# Altium PCB 第十二届直立摄像头.PcbDoc (part 2 of 3)
Units mil, origin at the board's own origin, x right, y up, seen from the top; angles counter-clockwise.
Board outline 3925 x 2095 mil, 2 copper layers (Top Layer, Bottom Layer); 127 components, 103 nets, 557 pads, 326 vias.
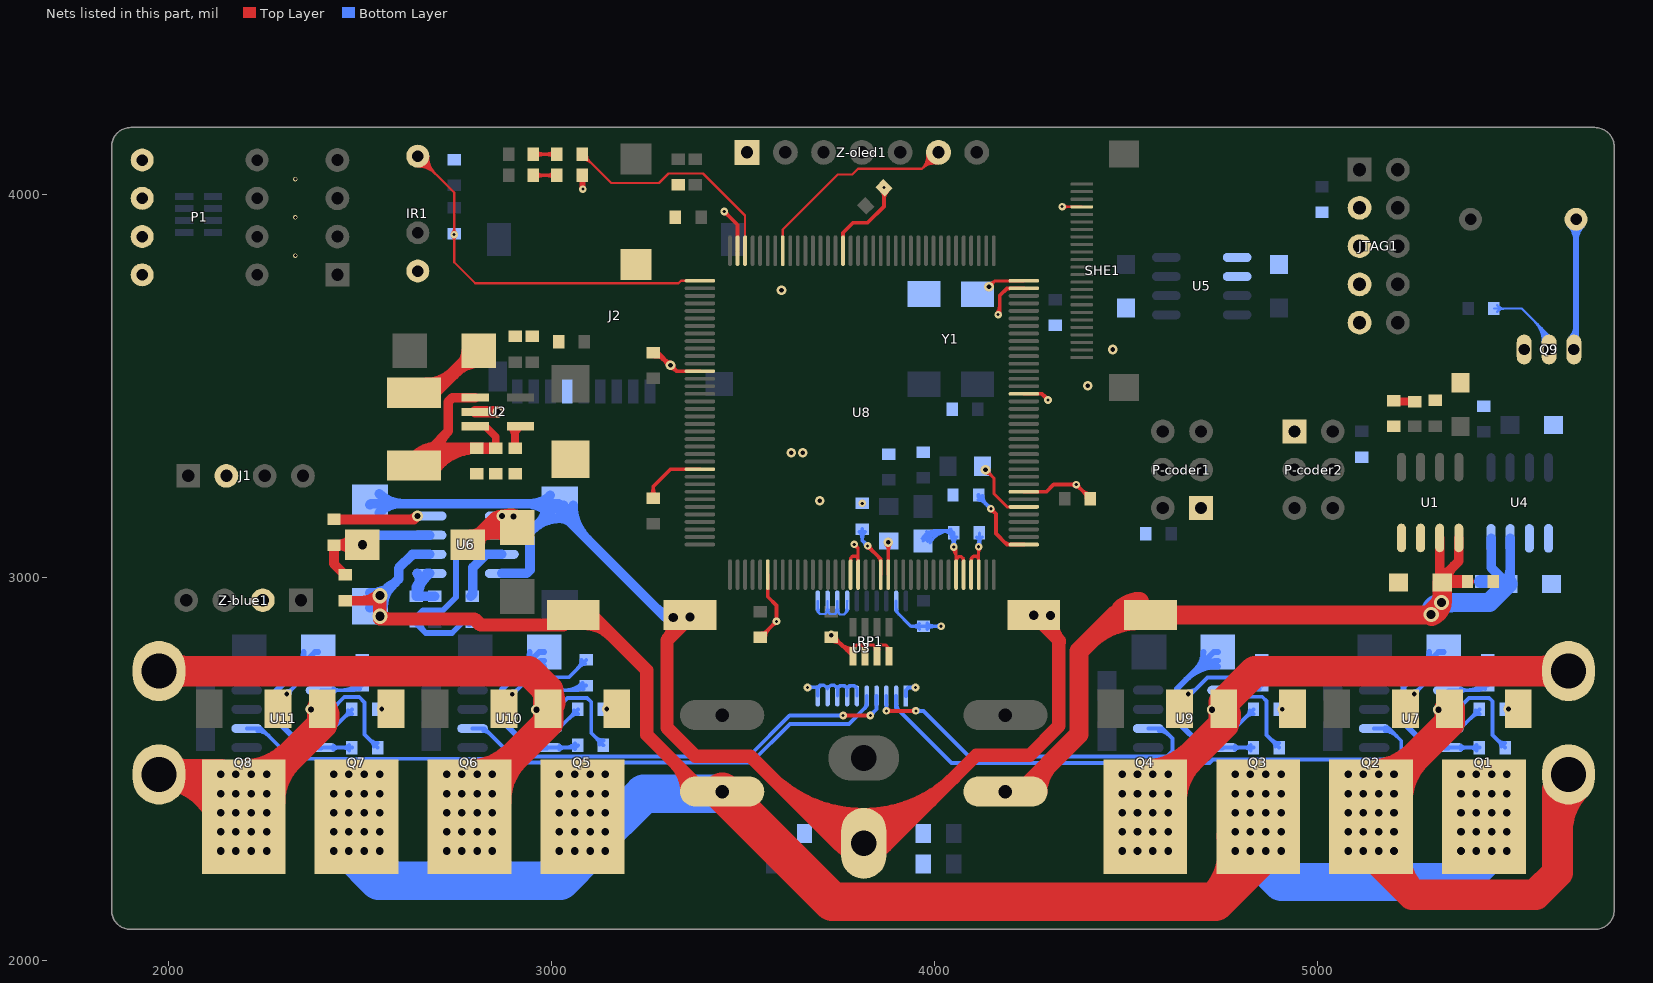
[diagram p2: the nets of this part, all layers, seen from the top]

## Via types
v1: diameter 31.5, hole 19.68, Top Layer to Bottom Layer, 160 vias
v2: diameter 25, hole 12, Top Layer to Bottom Layer, 66 vias
v3: diameter 20, hole 8, Top Layer to Bottom Layer, 61 vias
v4: diameter 40, hole 24, Top Layer to Bottom Layer, 20 vias
v5: diameter 28, hole 16, Top Layer to Bottom Layer, 14 vias
v6: diameter 12, hole 8, Top Layer to Bottom Layer, 3 vias
v7: diameter 39.37, hole 39.37, Top Layer to Bottom Layer, 2 vias

## Nets (pads, with @x,y where several pads share a name; then routed paths per layer and width w, separated by ;. In a path a pad name is that pad's centre, name@x,y a point inside that pad or via, vN(x,y) a via of type N, cw(c..) or ccw(c..) an arc to the next point about the centre after c; other vN are vias at no path point) (continued)
D7V2: C1.1 C22.1 Q1.2 Q3.2 Q5.2 Q7.2 R7.2 U6.6 驱动开关.2 | length 5694.2
  Top Layer w25: R7.2@2460,2939 2534,2939 ; 2501.51,2939 ccw(c2501.51,3001.49) v4@2545.7,2957.3 ; v4@2545,2950 2534,2939 ; v4@2550.1,2944.55 ccw(c2547.75,2925.25) 2534,2939
  Top Layer w35: v4@2551,2891 2798,2891 2813.78,2875.22 3030.22,2875.22 C1.1@3056,2901 3104,2901 3248,2757 3248,2589 3397,2440 驱动开关.2@3445,2440 ; v4(2551,2898) v4(2551,2952) ; v4@2552.77,2899.77 ccw(c2573.93,2920.93) 2573.93,2891 ; C1.1@3085.53,2879.13 cw(c3085.53,2781.73) 3154.4,2850.6 ; 3321.03,2515.97 cw(c3245.07,2440) 驱动开关.2@3352.5,2440
  Top Layer w100: 驱动开关.2@3445,2440 3732.52,2152.48 4733.48,2152.48 ; Q3.2@4786.74,2323.87 cw(c4597.17,2288.81) 4733.49,2152.49 ; v1(4865,2285) 4865,2284 4733.48,2152.48
  Bottom Layer w25: C22.1@2525,2920 2600,2995 2600,3024 2636,3060 U6.6@2680.51,3060 ; C22.1@2525,2959.24 ccw(c2525,3053.96) 2591.98,2986.98 ; C22.1@2533.95,2928.95 ccw(c2510.91,2952) C22.1@2543.5,2952 ; C22.1@2550.01,2959.43 ccw(c2543.53,3007.83) 2584.98,2982.01 ; C22.1@2551,2959.5 ccw(c2551,2992.09) 2574.05,2969.05 ; C22.1@2558.27,2950.14 cw(c2606.19,2937.9) 2580.96,2980.44 ; C22.1@2559.94,2924.3 cw(c2633.93,2924.3) 2581.61,2976.61 ; 2628.67,3052.67 cw(c2648.03,3033.31) U6.6@2648.03,3060.69
  Bottom Layer w100: v1(2470,2285) 2547.75,2207.25 3022.25,2207.25 v1(3100,2285) ; v1@3100,2294 3240.5,2434.5 驱动开关.2@3450.5,2434.5 ; v1(4825,2285) 4906,2204 5374,2204 v1(5455,2285)
  other v1: 2430,2285 2510,2285 2550,2285 3020,2285 3060,2285 3140,2285 4785,2285 4905,2285 5375,2285 5415,2285 5495,2285 2430,2335 2470,2335 2510,2335 2550,2335 3020,2335 3060,2335 3100,2335 3140,2335 4785,2335 4825,2335 4865,2335 4905,2335 5375,2335 5415,2335 5455,2335 5495,2335 2430,2385 2470,2385 2510,2385 2550,2385 3020,2385 3060,2385 3100,2385 3140,2385 4785,2385 4825,2385 4865,2385 4905,2385 5375,2385 5415,2385 5455,2385 5495,2385 2430,2435 2470,2435 2510,2435 2550,2435 3020,2435 3060,2435 3100,2435 3140,2435 4785,2435 4825,2435 4865,2435 4905,2435 5375,2435 5415,2435 5455,2435 5495,2435 2430,2485 2470,2485 2510,2485 2550,2485 3020,2485 3060,2485 3100,2485 3140,2485 4785,2485 4825,2485 4865,2485 4905,2485 5375,2485 5415,2485 5455,2485 5495,2485
DC_MOSI_SOUT: U8.101 Z-oled1.6 | length 752.4
  Top Layer w6: U8.101@3603.31,3853.07 3603.31,3908.31 3747,4052 3785.03,4052 3800.03,4067 3967,4067 ; Z-oled1.6@3980.71,4106.53 cw(c3933.12,4100.89) 3967,4067 ; Z-oled1.6@3986.66,4107.23 cw(c3948.75,4102.74) 3975.75,4075.75 cw(c4002.74,4048.75) Z-oled1.6@4007.23,4086.66 ; Z-oled1.6@3992.62,4107.94 cw(c3964.39,4104.59) 3984.49,4084.49 cw(c4004.59,4064.39) Z-oled1.6@4007.94,4092.62 ; Z-oled1.6@4006.53,4080.71 ccw(c4000.89,4033.12) 3967,4067 ; Z-oled1.6@4010,4110 3967,4067
IR_OUT: IR1.3 R9.1 U8.109 | length 1275.5
  Top Layer w6: IR1.3@2650,4073 cw(c2650,4007.82) 2696.09,4053.91 cw(c2742.18,4100) IR1.3@2677,4100 ; IR1.3@2650,4079 cw(c2650,4028.3) 2685.85,4064.15 cw(c2721.7,4100) IR1.3@2671,4100 ; IR1.3@2650,4085 cw(c2650,4048.79) 2675.61,4074.39 cw(c2701.21,4100) IR1.3@2665,4100 ; IR1.3@2650,4100 2745,4005 2745,3823.2 2800,3768.2 3331.2,3768.2 3337.49,3774.49 U8.109@3386.93,3774.49 ; v3@2740.05,3890.05 cw(c2728.1,3878.1) 2745,3878.1 cw(c2761.9,3878.1) v3@2749.95,3890.05 ; v3@2740.05,3899.95 ccw(c2728.1,3911.9) 2745,3911.9 ccw(c2761.9,3911.9) v3@2749.95,3899.95
  other v3: 2745,3895
LED0: R20.2 U8.106 | length 665.5
  Top Layer w6: R20.2@3080,4090.5 cw(c3080,4055.49) 3104.75,4080.25 ; R20.2@3080,4096.5 cw(c3080,4075.98) R20.2@3094.51,4090.49 ; R20.2@3080,4105 3155,4030 3280,4030 3305,4055 3395,4055 3504.88,3945.12 U8.106@3504.88,3853.07 ; R20.2@3092,4102.5 ccw(c3114.93,4102.5) 3098.72,4086.28
M7V2: C4.1 C5.1 C9.1 C16.1 C17.2 U1.3 U1.4 U4.3 U4.4 主板开关.2 | length 3113.8
  Top Layer w25: 5319.39,3025.47 ccw(c5364.09,3025.47) C4.1@5332.49,2993.86 ; U1.3@5319.39,3102.69 5319.39,2992.61 5369.39,3042.61 U1.4@5369.39,3102.69 ; C4.1@5338.5,2986 cw(c5400.57,2986) 5356.68,3029.89
  Top Layer w30: C4.1@5319.39,2992.61 5323,2989 C4.1@5326,2986 C4.1@5329,2989
  Top Layer w35: C4.1@5323,2989 5329,2989 C5.1@5392,2989
  Top Layer w50: 主板开关.2@4185,2440 4227.27,2440 4377,2589.73 4377,2807 4471,2901 C9.1@4564,2901 5290,2901 v4@5326,2937 ; 主板开关.2@4270,2440 cw(c4373.15,2440) 4300.21,2512.94 ; 4401.59,2831.59 cw(c4534.47,2698.7) C9.1@4534.47,2886.63 ; 4486.94,2916.94 cw(c4534.47,2869.41) C9.1@4534.47,2936.63 ; v4@5298.67,2898.29 ccw(c5284.92,2937) v4@5326,2937 ; v4@5300.54,2899.46 ccw(c5239.06,2960.94) 5326,2960.94 ; C4.1@5326,2986 v4@5326,2937
  Bottom Layer w25: U4.4@5453.61,3101.69 5453.61,3025.39 5490,2989 5503.61,3002.61 U4.3@5503.61,3101.69 ; C16.1@5475.66,3003.34 cw(c5454.32,2982) C16.1@5484.5,2982 ; C16.1@5478.99,3000.01 ccw(c5495.62,3016.65) C16.1@5495.62,2993.12 ; C16.1@5490.51,2989.86 ccw(c5458.91,3021.47) 5503.61,3021.47
  Bottom Layer w35: C17.2@5426,2989 5490,2989 C16.1@5497,2982 ; 5463.94,2989 cw(c5463.94,2950.32) C16.1@5491.29,2977.67
  Bottom Layer w50: v4@5292.03,2903.54 cw(c5326,2899.83) 5326,2934 5449,2934 C16.1@5497,2982 ; v4@5293.46,2906.54 cw(c5359.77,2840.23) 5359.77,2934 ; v4(5297,2903) v4@5326,2932
  other v4: 5324,2934
MGND: C1.2 C2.2 C3.1 C4.2 C5.2 C6.1 C7.1 C8.1 C9.2 C10.1 C11.1 C12.1 C13.1 C14.2 C15.1 C16.2 C17.1 C18.2 C19.2 C20.2 C21.2 C22.2 C23.1 C28.1 C29.1 C32.1 C33.1 C34.2 C35.1 C36.1 C37.1 C38.1 C39.1 C40.1 C42.1 C43.1 C46.1 C47.1 C48.1 C49.2 C50.2 D3.1 IR1.1 J1.2 J2.6 JTAG1.2 JTAG1.3 JTAG1.4 JTAG1.5 P1.1 P1.2 P1.3 P1.4 P-coder1.1 P-coder2.1 POWER1.2 Q9.2 R1.1 R3.2 R4.2 R5.2 R6.2 R14.1 R19.2 RP1.1 RP1.3 RP1.5 RP1.7 RST1.2 SHE1.4 U1.1 U1.2 U2.2 U3.1 U3.6 U3.7 U3.8 U3.9 U3.10 U3.11 U3.12 U3.13 U3.14 U3.19 U4.1 U4.2 U5.1 U5.2 U6.2 U6.4 U8.6 U8.17 U8.18 U8.33 U8.34 U8.44 U8.57 U8.71 U8.93 U8.107 U8.121 U8.134 Y1.2 Z-blue1.2 Z-oled1.1 | length 10534.5
  Top Layer w6: v3(4333,3968) 4333.2,3967.8 SHE1.4@4384.69,3967.8 ; v3@4337.95,3963.05 cw(c4349.41,3951.59) 4349.41,3967.8 ; v3@4337.95,3972.95 ccw(c4350.39,3985.39) 4350.39,3967.8
  Top Layer w8: U8.17@3780.47,3006.93 3780.47,3050.47 3785,3055 ; U8.17@3781.44,3042.17 cw(c3794.56,3045.44) 3785,3055 ; RP1.7@3786.51,2794 3786.51,2814.51 3795,2823 ; v3(3790,3086) 3800.16,3075.84 ; v3@3790.04,3080 cw(c3790.12,3065.8) 3800.16,3075.84 ; RP1.7@3791.26,2810.2 cw(c3804.82,2813.18) 3795,2823 ; v3@3796,3085.96 ccw(c3810.2,3085.88) 3800.16,3075.84 ; U8.18@3799.17,3042.09 ccw(c3784.47,3044.47) 3795,3055 ; U8.18@3800.16,3006.93 3800.16,3049.84 ; RP1.5@3813.32,2810.44 ccw(c3800.87,2813.86) 3810,2823 ; RP1.5@3818.01,2794 RP1.5@3818.01,2814.99 ; RP1.5@3822.69,2810.45 cw(c3835.11,2813.89) 3826,2823 ; RP1.3@3844.76,2810.19 ccw(c3831.16,2813.16) 3841,2823 ; RP1.3@3854.11,2810.7 cw(c3865.48,2814.52) 3857,2823 ; RP1.1@3876.32,2810.45 ccw(c3863.88,2813.88) 3873,2823 ; RP1.1@3881,2794 3881,2815 3873,2823 ; U8.33@4095.43,3006.93 4095.43,3049.43 4101,3055 ; U8.33@4096.43,3042.04 cw(c4112.26,3043.74) 4101,3055 ; v3@4110.76,3075.52 cw(c4100.23,3064.99) 4115.12,3064.99 ; U8.34@4114.13,3042.09 ccw(c4099.54,3044.54) 4110,3055 ; v3(4115,3079.76) 4115.12,3079.88 4115.12,3049.88 ; U8.34@4115.12,3006.93 4115.12,3049.88 ; 4115.12,3065.56 cw(c4129.2,3065.56) v3@4119.24,3075.52 ; v4(4259,2901) C9.2@4302,2901 ; C9.2@4261.96,2901 cw(c4261.96,2858.96) C9.2@4291.69,2888.69 ; C9.2@4266.79,2901 ccw(c4266.79,2936.21) C9.2@4291.69,2911.31 ; C9.2@4270.31,2889.69 cw(c4297.63,2862.37) 4297.63,2901 cw(c4297.63,2939.63) C9.2@4270.31,2912.31 ; C9.2@4272.34,2892.17 cw(c4279.48,2887.44) 4281.7,2895.71 cw(c4284.14,2904.81) C9.2@4274.82,2903.4 ; C9.2@4273.25,2908.27 ccw(c4279.27,2911.34) 4281.02,2904.81 ccw(c4283.27,2896.41) C9.2@4274.72,2898.02 ; C9.2@4281.27,2901 cw(c4281.27,2878.27) C9.2@4297.34,2894.34 ; 3785,3055 3795,3055 ; 3795,2823 3810,2823 ; 3795,3055 3800.16,3049.84 ; 3800.16,3049.84 3800.16,3075.84 ; 3810,2823 RP1.5@3818.01,2814.99 ; RP1.5@3818.01,2815.01 3826,2823 ; 3826,2823 3841,2823 ; 3841,2823 3849.5,2814.5 3849.5,2815.5 3857,2823 ; 3857,2823 3873,2823 ; 4101,3055 4110,3055 ; 4110,3055 4115.12,3049.88
  Top Layer w10: C43.1@3257.93,3214.07 ccw(c3240.86,3231.14) 3265,3231.14 ccw(c3289.14,3231.14) C43.1@3272.07,3214.07 ; C43.1@3265,3207 3265,3237 3310.36,3282.36 U8.134@3386.93,3282.36 ; C40.1@3265,3587 3277,3587 v2(3310,3554) 3325.73,3538.27 U8.121@3386.93,3538.27 ; C40.1@3267.5,3577 cw(c3267.5,3529.92) 3300.79,3563.21 ; C40.1@3267.5,3587 cw(c3267.5,3564.07) 3283.72,3580.28 ; 3288.96,3570.04 cw(c3274.15,3544.39) v2@3302.76,3552.06 ; 3299.1,3564.18 cw(c3295.28,3557.56) v2@3302.71,3555.77 ; v2@3302.5,3554 ccw(c3284.39,3554) 3297.2,3566.8 ccw(c3310,3579.61) v2@3310,3561.5 ; v2@3310,3546.5 cw(c3310,3528.39) 3322.8,3541.2 cw(c3335.61,3554) v2@3317.5,3554 ; v3@3450.5,3950.5 cw(c3450.5,3938.43) 3459.04,3946.96 cw(c3467.57,3955.5) v3@3455.5,3955.5 ; v3(3450.5,3955.5) 3485.2,3920.8 U8.107@3485.2,3853.07 ; C39.1@3545,2843 v3(3587,2885) 3587,2926 3563.94,2949.06 U8.6@3563.94,3006.93 ; C39.1@3547.5,2853 ccw(c3547.5,2871.11) 3560.3,2858.3 ; C39.1@3557.5,2843 cw(c3587.68,2843) 3566.34,2864.34 ; v3@3582,2885 cw(c3569.93,2885) 3578.46,2876.46 cw(c3587,2867.93) v3@3587,2880 ; v3@3583.46,2888.54 ccw(c3574.93,2897.07) 3587,2897.07 ccw(c3599.07,2897.07) v3@3590.54,2888.54 ; C42.1@3730,2841.5 cw(c3730,2819.74) C42.1@3745.38,2835.13 ; C42.1@3730,2843 3737.51,2843 RP1.7@3786.51,2794 ; C42.1@3730.35,2851.48 cw(c3728.15,2835.95) C42.1@3743.3,2840.01 ; C42.1@3730.79,2851.37 cw(c3724.36,2832.06) C42.1@3744.02,2837.33 ; C42.1@3732.5,2833 cw(c3732.5,2796.76) 3758.13,2822.38 ; C42.1@3737.5,2849 ccw(c3751.96,2849) C42.1@3741.73,2838.78 ; C42.1@3742.5,2843 ccw(c3754.54,2843) C42.1@3746.03,2834.48 ; 3754.05,2826.46 ccw(c3786.51,2858.92) RP1.7@3786.51,2813.02 ; U8.93@3760.79,3853.07 3760.79,3900.16 3786.63,3926 3825,3926 3867.63,3968.63 v3(3867.63,4017.63) ; 3771.12,2809.39 ccw(c3786.51,2824.78) RP1.7@3786.51,2803.02 ; C36.1@3862.32,4008.79 cw(c3849.52,3995.99) 3867.63,3995.99 ; C36.1@3864.09,4014.09 cw(c3855.56,4005.56) 3867.63,4005.56 cw(c3879.7,4005.56) C36.1@3871.16,4014.09 ; 3867.63,3987.45 cw(c3897.81,3987.45) C36.1@3876.47,4008.79 ; v3(3950,2712) v3@3951,2711 ; v3@4162.46,3689.54 ccw(c4144.27,3707.73) 4170,3707.73 ; v3(4166,3686) 4170,3690 4170,3736 4188.8,3754.8 U8.71@4233.07,3754.8 ; 4182.25,3748.25 cw(c4198.07,3732.43) U8.71@4198.07,3754.8 ; U8.44@4233.07,3223.31 4292.31,3223.31 4311,3242 v3(4370,3242) C38.1@4407,3205 ; U8.57@4233.07,3479.21 4280.79,3479.21 4296,3464 v3(4296,3463) ; 4286.76,3473.24 cw(c4276.51,3463) v3@4291,3463 ; 4289.17,3470.83 ccw(c4296,3477.66) v3@4296,3468 ; v3@4366.46,3238.46 ccw(c4357.93,3229.93) 4357.93,3242 ccw(c4357.93,3254.07) v3@4366.46,3245.54 ; v3@4370,3237 cw(c4370,3224.93) 4378.54,3233.46 cw(c4387.07,3242) v3@4375,3242 ; 4385.66,3226.34 ccw(c4407,3247.68) C38.1@4407,3217.5 ; 4391.7,3220.3 cw(c4378.89,3207.5) C38.1@4397,3207.5
  Top Layer w15: R19.2@3074.7,4042.2 cw(c3061.89,4029.39) 3080,4029.39 cw(c3098.11,4029.39) R19.2@3085.3,4042.2 ; R19.2@3080,4050 3080,4015 v3(3081,4014)
  Top Layer w30: U2.2@2799.94,3432 v5(2859,3432)
  Top Layer w35: C1.2@3311.47,2892.15 cw(c3265.29,2871.71) 3301,2836 ; C1.2@3314.63,2894.2 cw(c3260.92,2876.08) 3301,2836 ; v4(3361,2896) 3301,2836 ; 3569.14,2481.86 ccw(c3815,2727.71) 3815,2380.02 ccw(c3815,2715.64) 4052.32,2478.32 ; 3628.89,2422.11 ccw(c3815,2608.22) 3815,2345.02 ccw(c3815,2596.15) 3992.57,2418.57 ; 3688.64,2362.36 ccw(c3815,2488.72) 3815,2310.02 ccw(c3815,2476.65) 3932.82,2358.82 ; 3748.39,2302.61 ccw(c3815,2369.22) 3815,2275.02 ccw(c3815,2357.15) POWER1.2@3873.08,2299.08 ; POWER1.2@3778.27,2285.57 ccw(c3746,2268.5) 3746,2305 ; POWER1.2@3778.27,2324.43 cw(c3746,2341.5) 3746,2305 ; POWER1.2@3852.96,2288.09 cw(c3879,2276.5) 3879,2305 ; POWER1.2@3852.96,2321.91 ccw(c3879,2333.5) 3879,2305 ; v4(4259,2901) 4326,2834 ; C9.2@4301.23,2898.24 cw(c4280.86,2877.95) C9.2@4309.61,2877.9 ; C9.2@4305.46,2899.56 ccw(c4378.41,2886.42) 4326,2834 ; C9.2@4309.64,2895.3 ccw(c4370.78,2878.78) 4326,2834 ; 3301,2836 3301,2606.98 3374.98,2533 3518,2533 3746,2305 ; 3746,2305 POWER1.2@3815,2305 3879,2305 ; 3879,2305 4109,2535 4248.03,2535 4324.5,2611.47 4324.5,2828.75 4326,2830.25 4326,2834
  Bottom Layer w6: U3.11@3692.63,2914.32 cw(c3687.67,2909.36) 3694.68,2909.36 cw(c3701.7,2909.36) U3.11@3696.74,2914.32 ; U3.11@3694.68,2938.03 3694.68,2909.32 3700,2904 ; U3.11@3697.42,2915.41 ccw(c3707.74,2911.74) 3700,2904 ; U3.12@3717.44,2915.75 cw(c3704.98,2913.02) 3714,2904 ; U3.12@3718.44,2914.12 cw(c3715.32,2910.28) 3720.28,2910.28 ; U3.12@3720.28,2938.03 3720.28,2910.28 ; U3.12@3722.11,2914.12 ccw(c3725.23,2910.28) 3720.28,2910.28 ; U3.12@3723.11,2915.75 ccw(c3735.57,2913.02) 3726.55,2904 ; U3.13@3743.04,2915.7 cw(c3730.92,2912.81) 3739.73,2904 ; U3.13@3743.99,2914.16 cw(c3740.61,2910.13) 3745.87,2910.13 ; U3.13@3745.87,2938.03 3745.87,2910.13 ; U3.13@3747.74,2914.16 ccw(c3751.12,2910.13) 3745.87,2910.13 ; U3.13@3748.74,2915.95 ccw(c3763.69,2913.69) 3753,2903 ; U3.14@3768.57,2916.05 cw(c3752.73,2914.27) 3764,2903 ; U3.14@3769.4,2914.32 cw(c3765.54,2910.47) 3771,2910.47 ; U3.14@3771.46,2938.03 3771,2937.58 3771,2910 ; U3.14@3773.1,2913.98 ccw(c3775.86,2909.98) 3771,2909.98 ; 3700,2904 3714,2904 ; 3714,2904 3720.28,2910.28 ; 3720.28,2910.28 3726.55,2904 ; 3726.55,2904 3739.73,2904 ; 3739.73,2904 3745.87,2910.13 ; 3745.87,2910.13 3753,2903 ; 3753,2903 3764,2903 ; 3764,2903 3771,2910
  Bottom Layer w8: v3@3668,2713 v3@3668.32,2712.68 ; U3.10@3694.68,2690 3694.68,2712.68 3700,2718 3711,2718 ; U3.10@3696.22,2710.52 cw(c3711,2699.65) 3711,2718 ; U3.10@3696.59,2711.65 cw(c3703.68,2711.65) 3698.67,2716.67 ; 3712.02,2716.98 ccw(c3720.28,2725.23) 3720.28,2713.56 ccw(c3720.28,2723.9) 3727.59,2716.59 ; 3740.02,2715.98 ccw(c3745.87,2721.83) 3745.87,2713.56 ccw(c3745.87,2724.89) 3753.88,2716.88 ; U3.8@3745.87,2690 U3.8@3745.87,2708.87 ; U3.8@3747.21,2710.31 cw(c3763.37,2694.15) 3763.37,2717 ; U3.8@3747.76,2711.44 cw(c3754,2710.72) 3754,2717 ; U3.7@3770.11,2710.31 ccw(c3754,2694.27) 3754,2717 ; U3.7@3771.46,2690 U3.7@3771.46,2711.54 ; U3.7@3772.8,2710.31 cw(c3788.96,2694.15) 3788.96,2717 ; 3779.54,2717 cw(c3779.54,2694.15) U3.6@3795.7,2710.31 ; v3(3790,3086) v3@3791,3087 ; U3.6@3797.05,2690 3797.05,2710.95 3791,2717 3776.91,2717 U3.7@3771.46,2711.54 ; U3.19@3899.41,2938.03 3899.41,2910.59 3938,2872 C10.1@3971,2872 ; U3.19@3901.31,2916.38 ccw(c3919.89,2916.38) 3906.75,2903.25 ; C10.1@3960.72,2864.22 ccw(c3941.94,2845.44) 3941.94,2872 ccw(c3941.94,2898.56) C10.1@3960.72,2879.78 ; C33.1@4109.22,3105.72 cw(c4090.44,3086.94) 4117,3086.94 cw(c4143.56,3086.94) C33.1@4124.78,3105.72 ; v3@4110.76,3084.01 ccw(c4095.69,3099.08) C33.1@4117,3099.08 ; v3@4111.69,3084.77 ccw(c4107.09,3091.72) 4115.14,3093.88 ; v3@4112,3084.96 ccw(c4104.63,3097.72) 4118.87,3093.91 ; v3(4115,3079.76) 4117,3081.76 C33.1@4117,3116 ; 4118.77,3093.56 ccw(c4132.52,3089.88) v3@4120.2,3082.76 ; 3711,2718 3720.28,2708.72 3720.28,2709.28 3729,2718 3738,2718 3745.87,2710.13 U3.8@3745.87,2708.87 ; U3.8@3745.87,2708.87 3754,2717 ; 3754,2717 3766,2717 U3.7@3771.46,2711.54
  Bottom Layer w10: v3@3668.32,2712.68 U3.10@3694.68,2712.68 ; v3@3671.54,2708.46 cw(c3681.72,2698.28) 3681.72,2712.68 ; v3@3671.54,2715.54 ccw(c3678.42,2722.42) 3678.42,2712.68 ; U3.1@3925,2690 3925,2705 3932,2712 v3(3950,2712) ; v3@3946.46,2708.46 ccw(c3937.93,2699.93) 3937.93,2712 ccw(c3937.93,2724.07) v3@3946.46,2715.54 ; C10.1@3971,2872 v3(4017,2872) ; C10.1@3980.57,2864.93 cw(c3997.64,2847.86) 3997.64,2872 cw(c3997.64,2896.14) C10.1@3980.57,2879.07 ; v3@4013.46,2868.46 ccw(c4004.93,2859.93) 4004.93,2872 ccw(c4004.93,2884.07) v3@4013.46,2875.54
  Bottom Layer w15: R14.1@2655.81,2885.66 cw(c2685.59,2892.41) 2664,2914 ; R14.1@2656,2884 ccw(c2691.23,2884) 2666.32,2859.09 ; C21.2@2784.2,2877.7 ccw(c2771.39,2864.89) 2771.39,2883 ccw(c2771.39,2901.11) C21.2@2784.2,2888.3 ; C21.2@2792,2883 2768,2883 2739.5,2854.5 2670.91,2854.5 2646,2879.41 R14.1@2646,2884 2646,2896 2664,2914 ; U6.2@2869.49,3110 2795,3110 2750,3065 2750,2948 2716,2914 2664,2914
  Bottom Layer w25: C22.2@2525,3190 2527.5,3192.5 C20.2@3017.5,3192.5 ; C22.2@2549.71,3169 cw(c2606.45,3112.26) 2606.45,3192.5 ; C22.2@2549.71,3218.41 ccw(c2612.26,3280.97) 2612.26,3192.5 ; U6.4@2869.49,3010 2934,3010 2943,3019 2943,3102 2935,3110 ; U6.2@2869.49,3110 2935,3110 ; 2928.91,3192.5 cw(c2928.91,3097.2) C20.2@2996.29,3164.59 ; 2944.38,3192.5 ccw(c2944.38,3265.91) C20.2@2996.29,3214 ; 2948.9,3123.9 cw(c3021,3051.8) 3021,3153.76 cw(c3021,3112.15) C20.2@3050.42,3141.58 ; 2966.51,3141.51 ccw(c2919.32,3188.7) C20.2@2986.06,3188.7 ; C20.2@3030.94,3188.7 ccw(c3097.68,3188.7) C20.2@3050.49,3141.51 ; C20.2@3055.94,3188.7 ccw(c3183.04,3188.7) 3093.17,3098.83 ; 3270.05,2921.95 ccw(c3317,2968.89) v4@3317,2902.5 ; 3296.48,2896 cw(c3296.48,2874.48) v4@3311.7,2889.7 ; v4@3322.3,2889.7 cw(c3337.52,2874.48) 3337.52,2896 ; v4(3361,2896) 3296,2896 3021,3171 C20.2@3021,3189 C20.2@3017.5,3192.5 ; 2935,3110 C20.2@3017.5,3192.5
  other v2: 3730,2849 3700,3200 3625,3325 3655,3325 4400,3500 4465,3595 3600,3750
  other v3: 3668,2712 3811,3193
  other v4: 3317,2895 4303,2900
  other v6: 2330,3840 2330,3940 2330,4040
MOTOR_IN1: U3.2 U7.2 | length 1599
  Bottom Layer w10: U3.2@3899.41,2690 3899.41,2659.59 4044,2515 4718,2515 4727,2524 5195,2524 5219,2548 5219,2573 5187,2605 U7.2@5148,2605 ; U3.2@3900.31,2668.35 ccw(c3923.64,2668.35) 3907.15,2651.85 ; U7.2@5176.19,2598.19 cw(c5176.19,2555.65) 5206.27,2585.73 ; U7.2@5176.19,2608.19 cw(c5176.19,2589.79) 5189.2,2602.8
MOTOR_IN2: U3.3 U9.2 | length 1053.6
  Top Layer w10: v3@3873,2651 v3(3951,2651) ; v3@3877.54,2647.46 cw(c3886.07,2638.93) 3886.07,2651 cw(c3886.07,2663.07) v3@3877.54,2654.54 ; v3@3947.46,2647.46 ccw(c3938.93,2638.93) 3938.93,2651 ccw(c3938.93,2663.07) v3@3947.46,2654.54
  Bottom Layer w10: v3@3870.45,2654.52 ccw(c3861.87,2663.01) 3873.94,2663.07 ccw(c3886.01,2663.13) v3@3877.52,2654.55 ; U3.3@3873.82,2690 v3(3874,2651) ; v3(3951,2651) 3971,2651 4089.81,2532.19 4606.19,2532.19 4621,2547 4621,2579 4595,2605 U9.2@4558,2605 ; v3@3954.54,2647.46 cw(c3963.07,2638.93) 3963.07,2651 cw(c3963.07,2663.07) v3@3954.54,2654.54 ; U9.2@4586.19,2598.19 cw(c4586.19,2560.47) 4612.86,2587.14
MOTOR_IN3: U3.4 U10.2 | length 1265.4
  Top Layer w10: v3(3761,2639) v3(3832,2639) ; v3@3764.54,2635.46 cw(c3773.07,2626.93) 3773.07,2639 cw(c3773.07,2651.07) v3@3764.54,2642.54 ; v3@3828.46,2635.46 ccw(c3819.93,2626.93) 3819.93,2639 ccw(c3819.93,2651.07) v3@3828.46,2642.54
  Bottom Layer w10: U10.2@2793,2605 2824,2605 2897,2532 3514.37,2532 3621.37,2639 v3(3761,2639) ; U10.2@2821.19,2598.19 cw(c2821.19,2574.96) 2837.61,2591.39 ; v3@3757.46,2635.46 ccw(c3748.93,2626.93) 3748.93,2639 ccw(c3748.93,2651.07) v3@3757.46,2642.54 ; v3(3832,2639) 3848.23,2655.23 U3.4@3848.23,2690 ; v3@3832,2644 ccw(c3832,2656.07) 3840.54,2647.54 ccw(c3849.07,2639) v3@3837,2639
MOTOR_IN4: U3.5 U11.2 | length 1786.2
  Bottom Layer w10: U11.2@2203,2605 2241,2605 2320,2526 2852,2526 2862,2516 3521,2516 3622,2617 3776,2617 3822.64,2663.64 U3.5@3822.64,2690 ; U11.2@2231.19,2598.19 cw(c2231.19,2558.06) 2259.56,2586.44 ; 3817.76,2658.76 ccw(c3808.18,2668.35) U3.5@3821.73,2668.35
NetB1_1: B1.1 C24.2 Q1.3 Q2.2 U7.6 | length 2118.2
  Top Layer w80: v1(5080,2335) v1(5080,2285) v1(5120,2285) 5134,2285 5248,2171 ; Q2.2@5140,2484.61 ccw(c5140,2652.65) 5258.83,2533.83 ; v1(5160,2435) 5345.24,2620.24 Q1.3@5345.24,2656.73 ; Q2.2@5207.2,2317.93 ccw(c5357.53,2280.54) 5247.99,2171.01 ; Q2.2@5209.25,2415.35 cw(c5375.59,2415.35) 5257.97,2532.97 ; 5627,2335.38 cw(c5795.78,2335.38) B1.1@5676.43,2454.72 ; B1.1@5665,2485 5627,2447 5627,2228 5570,2171 5248,2171
  Bottom Layer w10: U7.6@5342,2655 5366,2655 5396,2685 5448,2685 5457,2676 5457,2588 C24.2@5490,2555 ; U7.6@5377,2655 cw(c5403.56,2655) 5384.78,2673.78 ; 5468.66,2576.34 ccw(c5490,2597.68) C24.2@5490,2567.5 ; 5474.7,2570.3 cw(c5461.89,2557.5) C24.2@5480,2557.5
  other v1: 5160,2285 5200,2285 5120,2335 5160,2335 5200,2335 5080,2385 5120,2385 5160,2385 5200,2385 5080,2435 5120,2435 5200,2435 5080,2485 5120,2485 5160,2485 5200,2485
  other v5: 5316,2654
NetB1_2: B1.2 C26.2 Q3.3 Q4.2 U9.6 | length 2035.7
  Top Layer w80: v1(4530,2435) v1(4570,2435) 4574,2435 4755.24,2616.24 Q3.3@4755.24,2656.73 4755.24,2673.24 4837,2755 B1.2@5656,2755 ; Q4.2@4550,2484.61 ccw(c4550,2662.31) 4675.65,2536.65 ; Q4.2@4619.25,2415.35 cw(c4775.93,2415.35) 4665.14,2526.14 ; Q3.3@4745.74,2606.74 ccw(c4710.75,2641.73) Q3.3@4760.24,2641.73 ; B1.2@5635.57,2734.57 ccw(c5586.23,2685.24) 5586.23,2755 ccw(c5586.23,2824.76) B1.2@5635.57,2775.43
  Bottom Layer w10: U9.6@4752,2655 4780,2655 4813,2688 4856,2688 4867,2677 4867,2588 C26.2@4900,2555 ; U9.6@4780.19,2661.81 ccw(c4780.19,2677.8) 4791.49,2666.49 ; U9.6@4787,2655 cw(c4803.9,2655) 4791.95,2666.95 ; 4878.66,2576.34 ccw(c4900,2597.68) C26.2@4900,2567.5 ; 4884.7,2570.3 cw(c4871.89,2557.5) C26.2@4890,2557.5
  other v1: 4490,2285 4530,2285 4570,2285 4610,2285 4490,2335 4530,2335 4570,2335 4610,2335 4490,2385 4530,2385 4570,2385 4610,2385 4490,2435 4610,2435 4490,2485 4530,2485 4570,2485 4610,2485
  other v5: 4725,2654
NetB2_1: B2.1 C30.2 Q5.3 Q6.2 U10.6 | length 2135.9
  Top Layer w80: B2.1@1965,2755 2940,2755 2990.24,2704.76 Q5.3@2990.24,2656.73 2990.24,2620.24 v1(2805,2435) ; B2.1@1994.43,2734.57 cw(c2043.77,2685.24) 2043.77,2755 cw(c2043.77,2824.76) B2.1@1994.43,2775.43 ; Q6.2@2785,2484.61 ccw(c2785,2652.65) 2903.83,2533.83 ; Q6.2@2854.25,2415.35 cw(c3020.59,2415.35) 2902.97,2532.97 ; 2975.42,2719.59 cw(c2927.56,2671.73) Q5.3@2995.24,2671.73
  Bottom Layer w10: U10.6@2987,2655 3011,2655 3041,2685 3092,2685 3103,2674 3103,2593 C30.2@3135,2561 ; U10.6@3022,2655 cw(c3048.56,2655) 3029.78,2673.78 ; 3113.66,2582.34 ccw(c3135,2603.68) C30.2@3135,2573.5 ; 3119.7,2576.3 cw(c3106.89,2563.5) C30.2@3125,2563.5
  other v1: 2725,2285 2765,2285 2805,2285 2845,2285 2725,2335 2765,2335 2805,2335 2845,2335 2725,2385 2765,2385 2805,2385 2845,2385 2725,2435 2765,2435 2845,2435 2725,2485 2765,2485 2805,2485 2845,2485
  other v5: 2960,2654
NetB2_2: B2.2 C44.2 Q7.3 Q8.2 U11.6 | length 1528.1
  Top Layer w80: B2.2@1994.43,2464.57 cw(c2043.77,2415.24) 2043.77,2485 cw(c2043.77,2554.76) B2.2@1994.43,2505.43 ; Q8.2@2101.29,2485 cw(c2101.29,2370.26) Q8.2@2204.68,2420.02 ; Q8.2@2132.6,2385.32 ccw(c1974.01,2309) B2.2@1974,2485 v1(2135,2485) ; Q8.2@2195,2484.61 ccw(c2195,2662.31) 2320.65,2536.65 ; v1(2215,2435) 2219,2435 2400.24,2616.24 Q7.3@2400.24,2656.73 ; Q8.2@2264.25,2415.35 cw(c2420.93,2415.35) 2310.14,2526.14 ; Q7.3@2390.74,2606.74 ccw(c2355.75,2641.73) Q7.3@2405.24,2641.73
  Bottom Layer w10: U11.6@2397,2655 2426,2655 2458,2687 2497,2687 2511,2673 2511,2589 C44.2@2545,2555 ; U11.6@2425.19,2661.81 ccw(c2425.19,2680.21) 2438.2,2667.2 ; U11.6@2432,2655 cw(c2446.49,2655) 2436.24,2665.24 ; 2523.66,2576.34 ccw(c2545,2597.68) C44.2@2545,2567.5 ; 2529.7,2570.3 cw(c2516.89,2557.5) C44.2@2535,2557.5
  other v1: 2135,2285 2175,2285 2215,2285 2255,2285 2135,2335 2175,2335 2215,2335 2255,2335 2135,2385 2175,2385 2215,2385 2255,2385 2135,2435 2175,2435 2255,2435 2175,2485 2215,2485 2255,2485
  other v5: 2371,2655
NetBZ1_2: BZ1.2 Q9.3 | length 465.4
  Bottom Layer w15: BZ1.2@5659.68,3919.09 cw(c5621.27,3880.68) 5675.59,3880.68 cw(c5729.91,3880.68) BZ1.2@5691.5,3919.09 ; Q9.3@5661.51,3622.99 ccw(c5627.53,3656.97) 5675.59,3656.97 ; Q9.3@5670,3595 5675.59,3600.59 BZ1.2@5675.59,3935
NetC11_2: C11.2 C12.2 F1.1 U2.1 U2.3 | length 976.1
  Top Layer w20: U2.3@2799.94,3394.6 2826.4,3394.6 2854,3367 C12.2@2854,3337
  Top Layer w25: F1.1@2673.36,3292.18 cw(c2737.43,3298.39) 2691.91,3343.91 ; 2685,3337 2729.37,3381.37 ; F1.1@2698.24,3294.59 cw(c2805.71,3305.01) 2729.36,3381.36 ; U2.1@2799.94,3469.4 2740.4,3469.4 2729.37,3458.37 2729.37,3381.37
  Top Layer w30: F1.1@2640,3292 2685,3337 C11.2@2804,3337 ; F1.1@2642.21,3312.3 cw(c2689.39,3279.59) 2689.39,3337 ; F1.1@2666.87,3295.21 cw(c2746.69,3239.87) 2746.69,3337 ; F1.1@2691.52,3278.12 cw(c2803.99,3200.15) C11.2@2804,3337 ; C12.2@2854,3337 C11.2@2804,3337
NetC13_2: C13.2 U2.4 | length 127.8
  Top Layer w20: U2.4@2892.86,3394.01 cw(c2865.98,3367.13) 2904,3367.13 ; U2.4@2893.11,3393.84 cw(c2885.57,3377.02) 2904,3377.02 ; C13.2@2904,3337 2904,3380.54 U2.4@2918.06,3394.6 U2.4@2931.4,3394.6
NetC21_1: C21.1 U6.3 | length 183.8
  Bottom Layer w25: C21.1@2788,2950 2794,2956 2794,3026 2828,3060 U6.3@2869.49,3060 ; 2822.81,3054.81 cw(c2837.01,3040.61) U6.3@2837.01,3060.69
NetC24_1: C24.1 D7.2 U7.8 | length 738.4
  Bottom Layer w10: U7.8@5342,2555 C24.1@5423,2555 ; U7.8@5375.01,2550.18 cw(c5386.63,2538.56) 5386.63,2555 cw(c5386.63,2571.44) U7.8@5375.01,2559.82 ; C24.1@5415.93,2547.93 ccw(c5398.86,2530.86) 5398.86,2555 ccw(c5398.86,2579.14) C24.1@5415.93,2562.07
  Bottom Layer w15: 5241.61,2730.61 cw(c5330,2642.23) D7.2@5330,2767.22 ; 5267.22,2756.22 cw(c5330,2693.44) D7.2@5330,2782.22 ; 5275.41,2764.41 ccw(c5234.82,2805) D7.2@5292.22,2805 ; D7.2@5330,2805 5316,2805 5225,2714 5225,2620 5290,2555 U7.8@5342,2555
NetC26_1: C26.1 D8.2 U9.8 | length 731.4
  Bottom Layer w10: U9.8@4752,2555 C26.1@4833,2555 ; U9.8@4785.01,2550.18 cw(c4796.63,2538.56) 4796.63,2555 cw(c4796.63,2571.44) U9.8@4785.01,2559.82 ; C26.1@4825.93,2547.93 ccw(c4808.86,2530.86) 4808.86,2555 ccw(c4808.86,2579.14) C26.1@4825.93,2562.07
  Bottom Layer w15: 4656.73,2732.73 cw(c4740,2649.47) D8.2@4740,2767.22 ; 4682.34,2758.34 cw(c4740,2700.68) D8.2@4740,2782.22 ; 4683.29,2759.29 ccw(c4637.58,2805) D8.2@4702.22,2805 ; D8.2@4740,2805 4729,2805 4633,2709 4633,2624 4702,2555 U9.8@4752,2555
NetC28_2: C28.2 U8.21 | length 226
  Top Layer w10: v3@3825,3077 cw(c3825,3064.93) 3833.54,3073.46 cw(c3842.07,3082) v3@3830,3082 ; v3(3825,3082) 3859.21,3047.79 U8.21@3859.21,3006.93 ; 3855.07,3051.93 cw(c3845.07,3041.93) U8.21@3859.21,3041.93
  Bottom Layer w10: C28.2@3803.93,3118.93 cw(c3786.86,3101.86) 3811,3101.86 cw(c3835.14,3101.86) C28.2@3818.07,3118.93 ; C28.2@3811,3126 3811,3096 v3(3825,3082) ; v3@3820,3082 ccw(c3807.93,3082) 3816.46,3090.54 ccw(c3825,3099.07) v3@3825,3087
NetC30_1: C30.1 D9.2 U10.8 | length 738.3
  Bottom Layer w10: U10.8@2987,2555 3062,2555 C30.1@3068,2561 ; U10.8@3020.01,2550.18 cw(c3031.63,2538.56) 3031.63,2555 cw(c3031.63,2571.44) U10.8@3020.01,2559.82 ; 3035.41,2555 ccw(c3035.41,2591.09) C30.1@3060.93,2565.57 ; 3052.31,2555 cw(c3052.31,2542.81) C30.1@3060.93,2551.43
  Bottom Layer w15: 2893.32,2731.32 cw(c2980,2644.64) D9.2@2980,2767.22 ; 2918.93,2756.93 cw(c2980,2695.85) D9.2@2980,2782.22 ; 2924.71,2762.71 ccw(c2882.41,2805) D9.2@2942.22,2805 ; D9.2@2980,2805 2967,2805 2869,2707 2869,2626 2940,2555 U10.8@2987,2555
NetC33_2: C33.2 L2.1 U8.31 U8.32 | length 748.5
  Top Layer w8: v3@4045.76,3074.76 cw(c4021.03,3050.03) 4056,3050.03 ; v3(4050,3079) 4056,3073 4056,3047 ; v3@4051.41,3080.41 cw(c4040.34,3069.34) 4056,3069.34 ; U8.31@4056.06,3006.93 4056,3006.99 4056,3047 ; U8.31@4057.06,3041.93 cw(c4071.87,3041.93) 4061.4,3052.4 ; U8.32@4074.75,3041.96 ccw(c4058.51,3042.51) 4070,3054 ; U8.32@4075.75,3006.93 4075.75,3048.25 4070,3054 ; 4056,3047 4063,3054 4070,3054
  Bottom Layer w8: L2.1@3967.39,3101.49 cw(c4002.7,3081.37) 4002.7,3122 ; L2.1@3970,3095 3997,3122 ; L2.1@3974.34,3097.52 cw(c4016.46,3073.52) 4016.46,3122 ; L2.1@3979.08,3118.94 ccw(c3985.88,3133.12) 3997,3122 ; L2.1@3981.29,3093.56 cw(c4030.23,3065.68) 4030.23,3122 ; L2.1@3988.25,3089.6 cw(c4044,3057.83) C33.2@4044,3122 ; L2.1@3990.77,3103.11 cw(c4012.63,3106.37) 3997,3122 ; 4014.99,3122 cw(c4014.99,3083.49) C33.2@4042.22,3110.72 ; 4031.89,3122 ccw(c4031.89,3136.61) C33.2@4042.22,3126.28 ; 4034.31,3122 cw(c4034.31,3102.81) C33.2@4047.88,3116.38 ; C33.2@4042.22,3105.72 cw(c4023.44,3086.94) 4050,3086.94 cw(c4076.56,3086.94) C33.2@4057.78,3105.72 ; v3@4045,3082.32 ccw(c4030.15,3092.17) 4047.36,3096.78 ; v3@4045.76,3083.24 ccw(c4035.51,3093.49) 4050,3093.49 ccw(c4064.49,3093.49) v3@4054.24,3083.24 ; v3(4050,3079) C33.2@4050,3116 C33.2@4044,3122 ; 4052.64,3096.78 ccw(c4069.85,3092.17) v3@4055,3082.32 ; 3997,3122 C33.2@4044,3122
NetC44_1: C44.1 D14.2 U11.8 | length 723.3
  Bottom Layer w10: U11.8@2397,2555 C44.1@2478,2555 ; U11.8@2430.01,2550.18 cw(c2441.63,2538.56) 2441.63,2555 cw(c2441.63,2571.44) U11.8@2430.01,2559.82 ; C44.1@2470.93,2547.93 ccw(c2453.86,2530.86) 2453.86,2555 ccw(c2453.86,2579.14) C44.1@2470.93,2562.07
  Bottom Layer w15: 2310.54,2734.31 cw(c2390,2654.85) D14.2@2390,2767.22 ; 2331.71,2755.48 ccw(c2282.2,2805) D14.2@2352.22,2805 ; 2336.15,2759.92 cw(c2390,2706.07) D14.2@2390,2782.22 ; D14.2@2390,2805 2381.23,2805 2280,2703.77 2280,2627 2352,2555 U11.8@2397,2555
NetC46_2: C46.2 U8.37 | length 298.5
  Top Layer w10: v3@4147,3174 cw(c4147,3161.93) 4155.54,3170.46 cw(c4164.07,3179) v3@4152,3179 ; v3(4147,3179) 4160,3166 4160,3114 4188.49,3085.51 U8.37@4233.07,3085.51 ; 4181.71,3092.29 ccw(c4198.07,3108.64) U8.37@4198.07,3085.51
  Bottom Layer w10: C46.2@4115,3202.5 cw(c4115,3181.98) 4129.51,3196.49 ; C46.2@4115,3215 4115,3211 v3(4147,3179) ; C46.2@4125,3212.5 ccw(c4152.76,3212.5) 4133.13,3192.87 ; v3@4142,3179 ccw(c4129.93,3179) 4138.46,3187.54 ccw(c4147,3196.07) v3@4147,3184
NetD1_2: D1.2 R1.2 | length 70.7
  Top Layer w20: R1.2@5199,3461 5201,3459 D1.2@5254,3459 ; R1.2@5205.04,3464.54 ccw(c5218.4,3477.9) 5218.4,3459
NetD2_2: D2.2 F1.2 | length 400.2
  Top Layer w35: F1.2@2640,3482 2692,3482 2802,3592 D2.2@2809,3592 ; F1.2@2671.5,3503.87 ccw(c2671.5,3606.17) 2743.83,3533.83 ; 2749.63,3539.63 cw(c2809,3480.27) D2.2@2809,3564.22 ; D2.2@2766.53,3556.53 ccw(c2731.07,3592) D2.2@2781.22,3592
NetD5_1: D5.1 L1.2 U6.1 | length 767.7
  Top Layer w30: L1.2@2786.7,3109.37 ccw(c2786.7,3153.95) L1.2@2818.22,3122.43 ; L1.2@2809.89,3114.1 cw(c2870.62,3053.37) D5.1@2909.87,3129.75 ; L1.2@2811.07,3085 cw(c2884.16,3085) 2832.48,3136.68 ; 2838.98,3143.19 cw(c2890.37,3091.8) D5.1@2923.59,3156.44 ; 2847.82,3152.02 cw(c2869.49,3130.36) D5.1@2869.49,3161 ; D5.1@2868.51,3160.19 ccw(c2899.54,3154.31) D5.1@2873.44,3136.52 ; D5.1@2869.61,3160.99 ccw(c2866.79,3137.41) 2850,3154.21 ; D5.1@2879.86,3127.09 ccw(c2850,3124.2) 2850,3154.2 ; D5.1@2896.16,3103.07 ccw(c2850.87,3014.93) L1.2@2780.8,3085 2850,3154.2 ; D5.1@2899,3159.06 ccw(c2936.72,3156.72) D5.1@2910,3130 2885.8,3154.2 2850,3154.2 ; D5.1@2869.49,3161 cw(c2869.49,3138.04) 2885.73,3154.27 ccw(c2869.49,3138.04) D5.1@2869.49,3161
  other v5: 2900,3159 2869.49,3160
NetD10_2: D10.2 R19.1 | length 136.8
  Top Layer w10: D10.2@2952,4050 R19.1@3013,4050 ; D10.2@2959.07,4042.93 cw(c2976.14,4025.86) 2976.14,4050 cw(c2976.14,4074.14) D10.2@2959.07,4057.07 ; R19.1@3005.93,4042.93 ccw(c2988.86,4025.86) 2988.86,4050 ccw(c2988.86,4074.14) R19.1@3005.93,4057.07
NetD11_2: D11.2 U8.22 | length 113.4
  Top Layer w10: v2@3873.59,3086.59 cw(c3860.79,3073.79) 3878.9,3073.79 cw(c3897,3073.79) v2@3884.2,3086.59 ; U8.22@3878.9,3006.93 v2(3878.9,3091.9)
NetD12_2: D12.2 R20.1 | length 136.8
  Top Layer w10: D12.2@2952,4105 R20.1@3013,4105 ; D12.2@2959.07,4097.93 cw(c2976.14,4080.86) 2976.14,4105 cw(c2976.14,4129.14) D12.2@2959.07,4112.07 ; R20.1@3005.93,4097.93 ccw(c2988.86,4080.86) 2988.86,4105 ccw(c2988.86,4129.14) R20.1@3005.93,4112.07
NetD15_2: D15.2 U8.42 | length 196.5
  Top Layer w8: v2@4133,3272.5 cw(c4133,3251.98) 4147.51,3266.49 cw(c4162.02,3281) v2@4141.5,3281 ; v2(4133,3281) 4155,3259 4155,3218 4189.06,3183.94 U8.42@4233.07,3183.94
NetL1_1: L1.1 R7.1 R8.2 U6.7 | length 469.1
  Top Layer w25: R8.2@2432.01,3084 ccw(c2432.01,3152.28) L1.1@2480.3,3104 ; R8.2@2436.84,3084 cw(c2436.84,3022.54) L1.1@2480.3,3066 ; R7.1@2460,3006 2431,3035 R8.2@2431,3084 2504.2,3084 v4(2505.2,3085) ; L1.1@2484.68,3084 ccw(c2484.68,3105.52) L1.1@2499.9,3090.3
  Bottom Layer w25: v4(2505.2,3085) 2530.2,3110 U6.7@2680.51,3110
NetQ1_1: Q1.1 R15.2
  other v2: 5499,2656
NetQ2_1: Q2.1 R16.2 | length 295.5
  Bottom Layer w10: v2@5252.5,2695.5 5294,2737 5398,2737 R16.2@5445,2784 ; v2@5253,2702.5 ccw(c5253,2718.19) 5264.1,2707.1 ; v2@5260.5,2695 cw(c5281.02,2695) 5266.51,2709.51 ; 5423.66,2762.66 ccw(c5402.32,2784) R16.2@5432.5,2784 ; 5429.7,2768.7 cw(c5442.5,2755.89) R16.2@5442.5,2774
  other v2: 5253,2695
NetQ3_1: Q3.1 R17.2
  other v2: 4908,2655
NetQ4_1: Q4.1 R18.2 | length 300.3
  Bottom Layer w10: v2(4663,2695) 4670,2695 4713,2738 4809,2738 R18.2@4855,2784 R18.2@4849,2784 ; v2@4663,2702.5 ccw(c4663,2737.51) 4687.75,2712.75 ; 4833.66,2762.66 ccw(c4812.32,2784) R18.2@4842.5,2784 ; 4839.7,2768.7 cw(c4852.5,2755.89) R18.2@4852.5,2774
NetQ5_1: Q5.1 R21.2
  other v2: 3144,2656
NetQ6_1: Q6.1 R23.2 | length 296.6
  Bottom Layer w10: v2(2897,2694) 2942,2739 3045,2739 R23.2@3090,2784 ; v2@2897,2701.5 ccw(c2897,2719.61) 2909.8,2706.8 ccw(c2922.61,2694) v2@2904.5,2694 ; 3068.66,2762.66 ccw(c3047.32,2784) R23.2@3077.5,2784 ; 3074.7,2768.7 cw(c3087.5,2755.89) R23.2@3087.5,2774
NetQ7_1: Q7.1 R25.2
  other v2: 2556,2656
NetQ8_1: Q8.1 R26.2 | length 300.2
  Bottom Layer w10: v2(2308,2695) 2352,2739 2460,2739 R26.2@2505,2784 ; v2@2308,2702.5 ccw(c2308,2720.61) 2320.8,2707.8 ccw(c2333.61,2695) v2@2315.5,2695 ; 2483.66,2762.66 ccw(c2462.32,2784) R26.2@2492.5,2784 ; 2489.7,2768.7 cw(c2502.5,2755.89) R26.2@2502.5,2774
NetQ9_1: Q9.1 R27.1 | length 436.9
  Bottom Layer w6: R27.1@5461,3702 5534,3702 5605,3631 Q9.1@5605,3595 ; R27.1@5469.49,3693.51 cw(c5489.97,3673.03) 5489.97,3702 cw(c5489.97,3730.97) R27.1@5469.49,3710.49 ; 5565.17,3670.83 cw(c5508.83,3614.5) Q9.1@5588.5,3614.5 ; 5575.41,3660.59 cw(c5529.32,3614.5) Q9.1@5594.5,3614.5 ; 5585.65,3650.35 cw(c5549.8,3614.5) Q9.1@5600.5,3614.5 ; 5595.89,3640.11 cw(c5570.29,3614.5) Q9.1@5606.5,3614.5
NetR8_1: R8.1 U6.8 | length 248.7
  Top Layer w25: R8.1@2431,3151 2640,3151 v5(2649,3160) ; 2623.65,3151 ccw(c2623.65,3185.35) v5@2647.94,3161.06
NetR13_2: R13.2 R14.2 U6.5 | length 223.3
  Bottom Layer w25: U6.5@2648.59,3010.41 cw(c2627.04,2994.45) 2646,2975.49 ; R14.2@2651,2951 cw(c2722.19,2951) U6.5@2671.85,3001.34 ; U6.5@2673,3010 U6.5@2680.51,3010 2646,2975.49 ; R13.2@2694,2950 2647,2950 R14.2@2646,2951 2646,2975.49
NetR15_1: R15.1 U7.7 | length 157.9
  Bottom Layer w10: U7.7@5342,2605 5373,2605 R15.1@5423,2655 ; U7.7@5370.19,2611.81 ccw(c5370.19,2635.04) 5386.61,2618.61 ; 5401.66,2633.66 cw(c5423,2612.32) R15.1@5423,2642.5 ; 5407.7,2639.7 ccw(c5394.89,2652.5) R15.1@5413,2652.5
NetR16_1: R16.1 U7.5 | length 233.8
  Bottom Layer w10: U7.5@5342,2705 5423,2705 ; U7.5@5375.01,2700.18 cw(c5386.63,2688.56) 5386.63,2705 cw(c5386.63,2721.44) U7.5@5375.01,2709.82 ; 5389.39,2705 ccw(c5389.39,2770.11) R16.1@5435.43,2724.07 ; 5413.53,2705 ccw(c5413.53,2745.97) R16.1@5442.5,2717 ; R16.1@5438.44,2707.86 ccw(c5432.8,2695.2) 5423,2705 ; R16.1@5445,2717 5435,2717 5423,2705
NetR17_1: R17.1 U9.7 | length 157.9
  Bottom Layer w10: U9.7@4752,2605 4783,2605 R17.1@4833,2655 ; U9.7@4780.19,2611.81 ccw(c4780.19,2635.04) 4796.61,2618.61 ; 4811.66,2633.66 cw(c4833,2612.32) R17.1@4833,2642.5 ; 4817.7,2639.7 ccw(c4804.89,2652.5) R17.1@4823,2652.5
NetR18_1: R18.1 U9.5 | length 232.9
  Bottom Layer w10: U9.5@4752,2705 4834,2705 ; U9.5@4785.01,2700.18 cw(c4796.63,2688.56) 4796.63,2705 cw(c4796.63,2721.44) U9.5@4785.01,2709.82 ; 4799.39,2705 ccw(c4799.39,2770.11) R18.1@4845.43,2724.07 ; 4823.53,2705 ccw(c4823.53,2745.97) R18.1@4852.5,2717 ; R18.1@4848.56,2707.81 ccw(c4843.36,2695.65) 4834,2705 ; R18.1@4855,2717 4846,2717 4834,2705
NetR21_1: R21.1 U10.7 | length 157.9
  Bottom Layer w10: U10.7@2987,2605 3018,2605 R21.1@3068,2655 ; U10.7@3015.19,2611.81 ccw(c3015.19,2635.04) 3031.61,2618.61 ; 3046.66,2633.66 cw(c3068,2612.32) R21.1@3068,2642.5 ; 3052.7,2639.7 ccw(c3039.89,2652.5) R21.1@3058,2652.5
NetR23_1: R23.1 U10.5 | length 232.9
  Bottom Layer w10: U10.5@2987,2705 3069,2705 ; U10.5@3020.01,2700.18 cw(c3031.63,2688.56) 3031.63,2705 cw(c3031.63,2721.44) U10.5@3020.01,2709.82 ; 3034.39,2705 ccw(c3034.39,2770.11) R23.1@3080.43,2724.07 ; 3058.53,2705 ccw(c3058.53,2745.97) R23.1@3087.5,2717 ; R23.1@3083.56,2707.81 ccw(c3078.36,2695.65) 3069,2705 ; R23.1@3090,2717 3081,2717 3069,2705
NetR25_1: R25.1 U11.7 | length 157.9
  Bottom Layer w10: U11.7@2397,2605 2428,2605 R25.1@2478,2655 ; U11.7@2425.19,2611.81 ccw(c2425.19,2635.04) 2441.61,2618.61 ; 2456.66,2633.66 cw(c2478,2612.32) R25.1@2478,2642.5 ; 2462.7,2639.7 ccw(c2449.89,2652.5) R25.1@2468,2652.5
NetR26_1: R26.1 U11.5 | length 237.9
  Bottom Layer w10: U11.5@2397,2705 2484,2705 ; U11.5@2430.01,2700.18 cw(c2441.63,2688.56) 2441.63,2705 cw(c2441.63,2721.44) U11.5@2430.01,2709.82 ; 2449.39,2705 ccw(c2449.39,2770.11) R26.1@2495.43,2724.07 ; 2473.53,2705 ccw(c2473.53,2745.97) R26.1@2502.5,2717 ; R26.1@2498.56,2707.81 ccw(c2493.36,2695.65) 2484,2705 ; R26.1@2505,2717 2496,2717 2484,2705
NetU8_72: U8.72 Y1.3 | length 129.7
  Top Layer w8: v2(4142,3759) 4157.49,3774.49 U8.72@4233.07,3774.49 ; v2@4142,3767.5 ccw(c4142,3788.02) 4156.51,3773.51 ccw(c4171.02,3759) v2@4150.5,3759